# Altium PCB PCB_split_action_2_into_1_1.PcbDoc
Units mm, origin at the board's own origin, x right, y up, seen from the top; angles counter-clockwise.
Board outline 26 x 25 mm, 2 copper layers (Top Layer, Bottom Layer); 6 components, 4 nets, 12 pads, 0 vias.
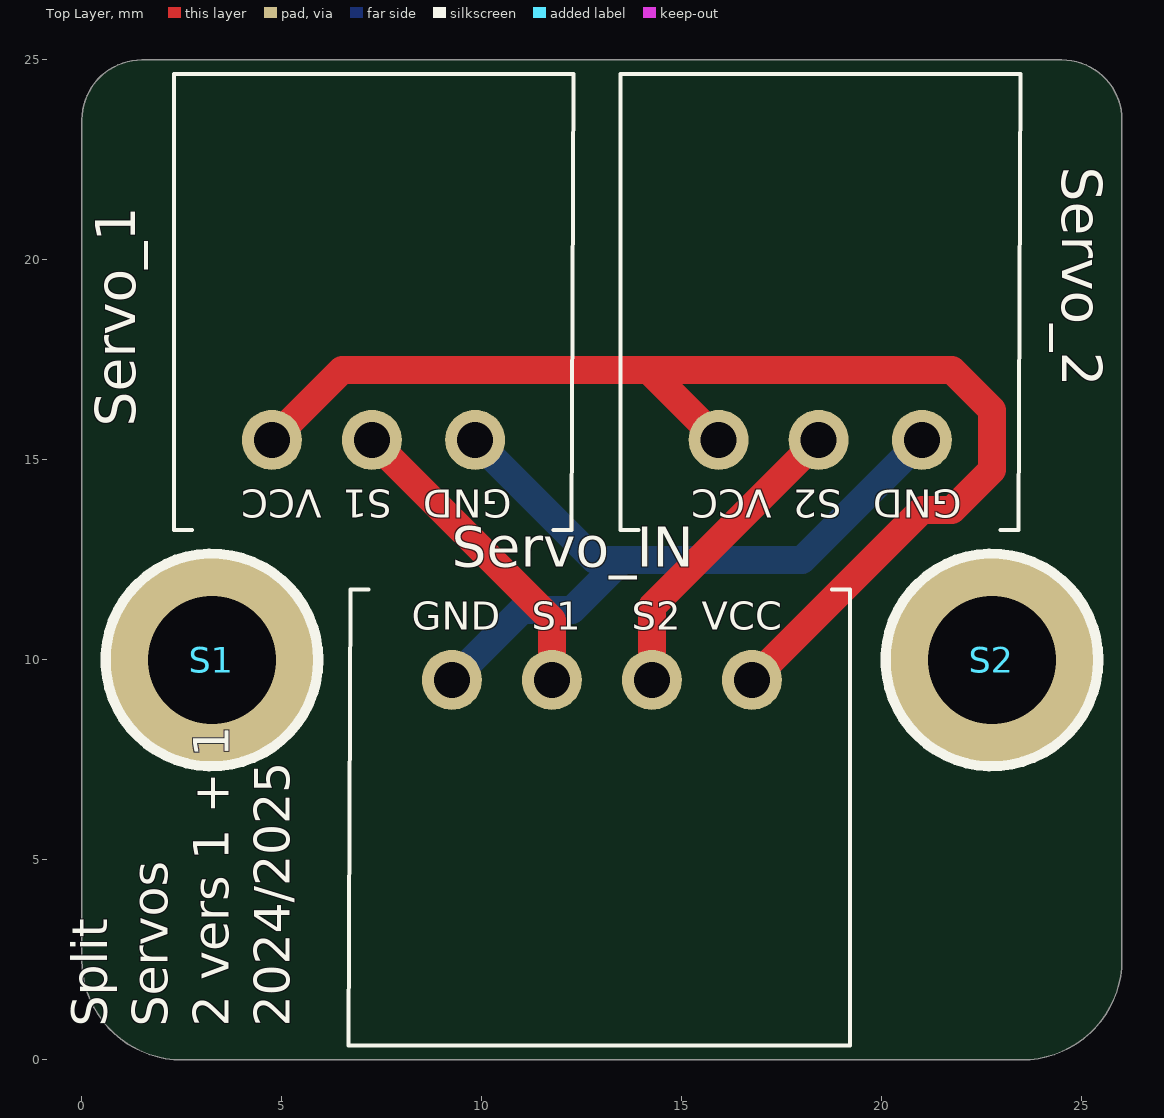
[diagram p0: Top Layer view]
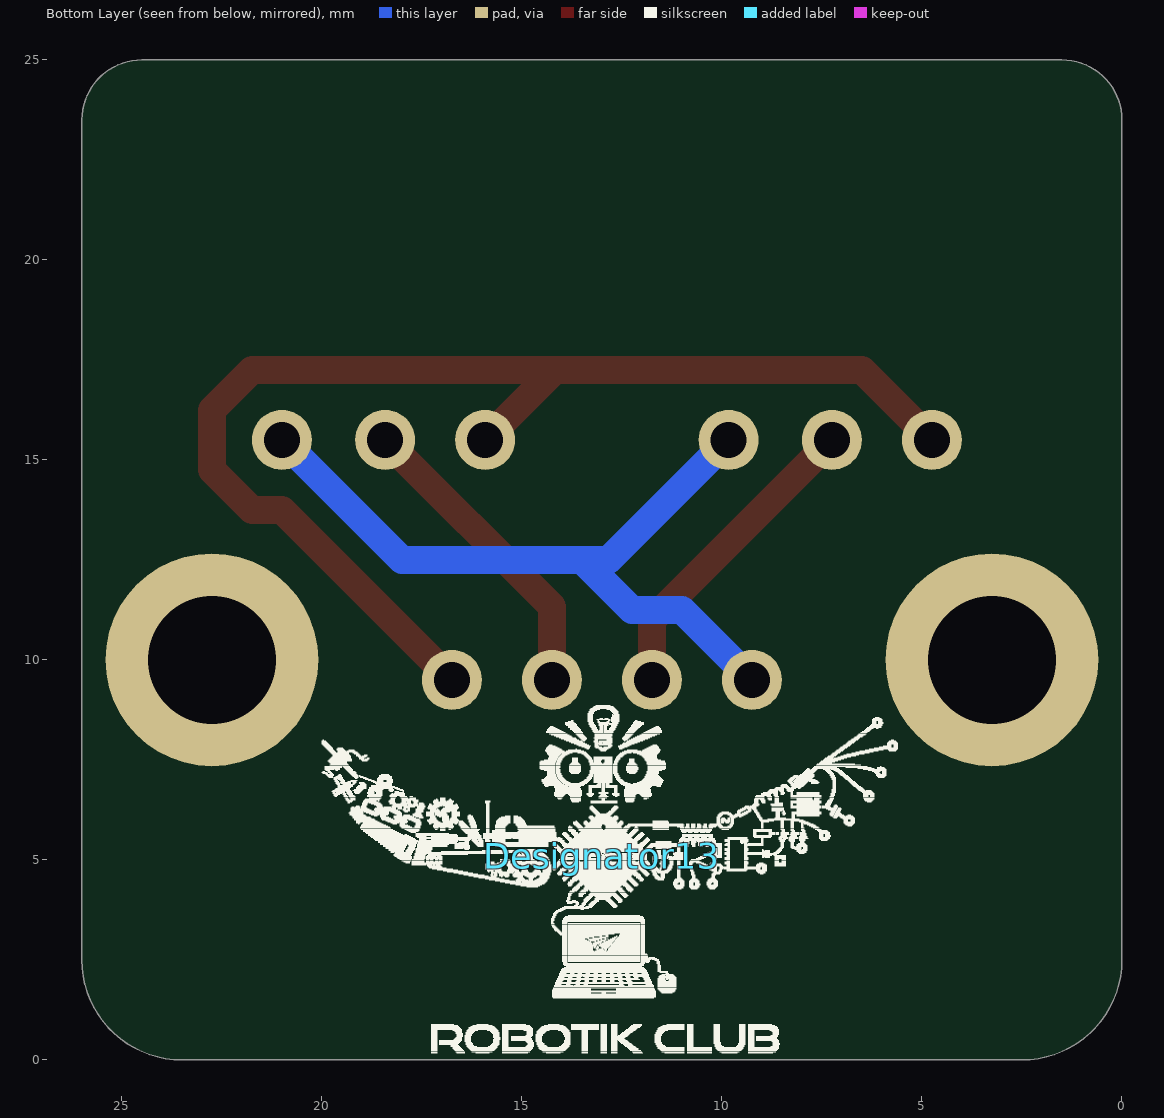
[diagram p1: Bottom Layer view, seen from below]
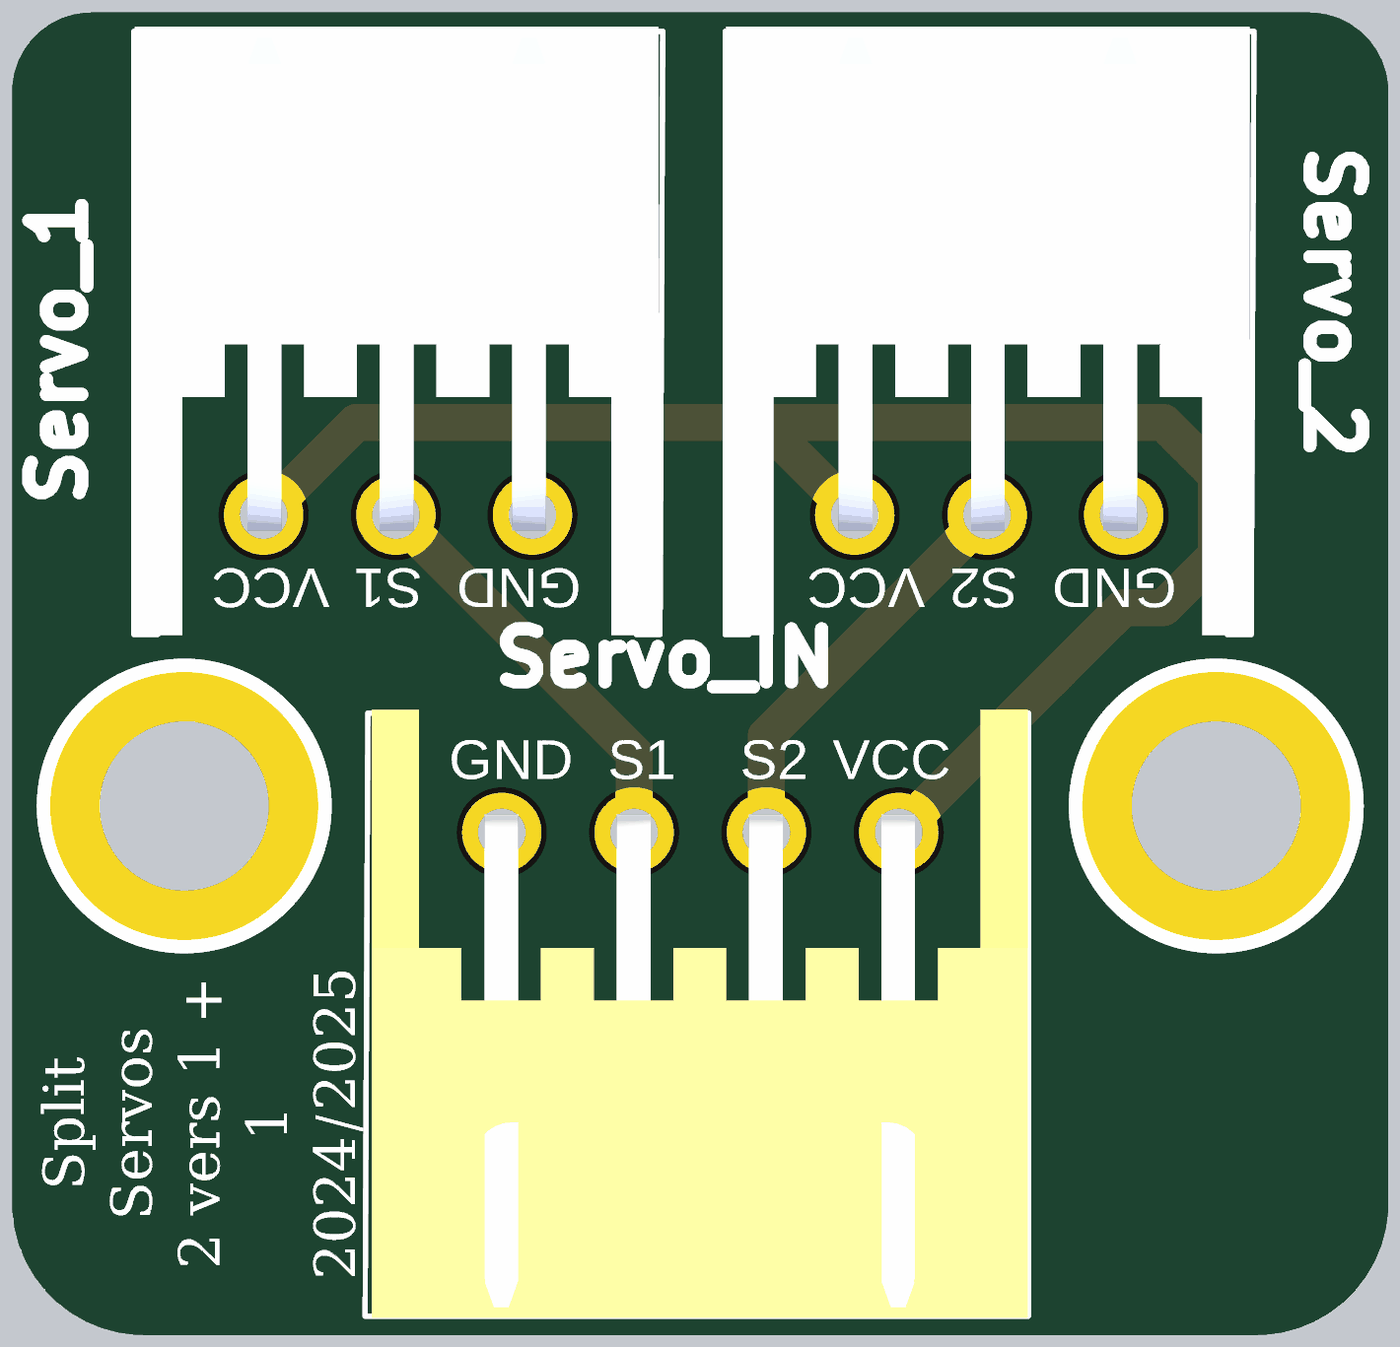
[diagram p2: 3D render of the assembled board from above, using the file's embedded part models]

## Layer stack, top to bottom
Top Solder: solder mask 0.0102, Solder Resist, Dk 3.5
Top Layer: signal copper 0.0356
Dielectric 1: dielectric 0.32, FR-4, Dk 4.8
Bottom Layer: signal copper 0.0356
Bottom Solder: solder mask 0.0102, Solder Resist, Dk 3.5

## Board outline
2.5,0 23.5,0 ccw(c23.5,2.5) 26,2.5 26,23.5 ccw(c24.5,23.5) 24.5,25 1.5,25 ccw(c1.5,23.5) 0,23.5 0,2.5 ccw(c2.5,2.5)

## Design rules (kind name [scope] priority, off if disabled: settings)
Clearance [All] p1: gap=0.254 ignorepadtopadclearanceinfootprint=FALSE
PolygonConnect [All] p1: connectstyle=Relief reliefconductorwidth=0.254 reliefentries=4 polygonreliefangle="90 Angle" airgapwidth=0.254
RoutingVias [All] p1: holewidth=0.711 width=1.27 viastyle="Through Hole" minholewidth=0.711 minwidth=1.27 maxholewidth=0.711 maxwidth=1.27
SolderMaskExpansion [All] p1: expansion=0.102 istentingtop=FALSE
SupplyNets "Schematic Supply Nets_1" [InNet('VCC')] p1: voltage=0.000
SupplyNets "Schematic Supply Nets" [InNet('GND')] p2: voltage=0.000
Width [All] p1: maxlimit=0.7 minlimit=0.254 preferedwidth=0.7
30 further rules are at their usual default settings.

## Classes and differential pairs
component class SchemaSplit_2_into_1_1: S1 S2 Servo_1 Servo_2 Servo_IN

## Components (designator, comment, footprint, x,y, rotation, side; value= is the part's Value field where it differs from the comment)
Designator13 "Comment" Logo_lowres 13,5.1 r180 bottom
S1 "Screw M3" "Screw M3" 3.25,10 r0 top
S2 "Screw M3" "Screw M3" 22.75,10 r0 top
Servo_1 "S3B-XH-A" S3B-XH-A 4.75,15.5 r0 top
Servo_2 "S3B-XH-A" S3B-XH-A 15.92,15.5 r0 top
Servo_IN "Header 4H" S4B-XH-A 16.75,9.5 r180 top

## Footprints (in the part's own frame and the unit in brackets; to place one, negate y for a bottom-side part, rotate by r counter-clockwise, add the part's x,y. Pads: shape width x height; smd on the part's side, far side on the other; paste and mask are expansions set on the pad)
Logo_lowres [mm]
  silkscreen extent -7.01,-4.93 7.39,3.76
S3B-XH-A [mm]
  round 1.5 hole 0.9: 1(0,0) 2(2.5,0) 3(5.08,0)
  silkscreen extent -2.45,-2.26 7.54,9.14, body extent -2.44,-2.27 7.46,9.23, height 6.15
S4B-XH-A [mm]
  round 1.5 hole 0.9: 1(0,0) 2(2.5,0) 3(5,0) 4(7.5,0)
  silkscreen extent -2.45,-2.26 10.08,9.14, body extent -2.44,-2.32 9.96,9.18, height 6.15
"Screw M3" [mm] "M3 iso Screw"
  round 5.32 hole 3.2 unplated: 0(0,0)
  silkscreen extent -2.66,-2.66 2.66,2.66

## Part data
Servo_1 Servo_2: library part "Header 3H", "Header, 3-Pin, Right Angle", LatestRevisionDate=17-Jul-2002, LatestRevisionNote="Re-released for DXP Platform.", Publisher="Altium Limited"
Servo_IN: "Header, 4-Pin, Right Angle", LatestRevisionDate=17-Jul-2002, LatestRevisionNote="Re-released for DXP Platform.", Publisher="Altium Limited"

## Nets (pads, with @x,y where several pads share a name; then routed paths per layer and width w, separated by ;. In a path a pad name is that pad's centre, name@x,y a point inside that pad or via, vN(x,y) a via of type N, cw(c..) or ccw(c..) an arc to the next point about the centre after c; other vN are vias at no path point)
GND: Servo_1.3 Servo_2.3 Servo_IN.4 | length 19.1
  Bottom Layer w0.7: Servo_IN.4 11,11.25 12.25,11.25 13.5,12.5 ; Servo_1.3 12.83,12.5 13.5,12.5 ; Servo_2.3 18,12.5 13.5,12.5
S_IN_1: Servo_1.2 Servo_IN.3 | length 8.1
  Top Layer w0.7: Servo_1.2 11.75,11 Servo_IN.3 Servo_IN.3@11.597,9.653
S_IN_2: Servo_2.2 Servo_IN.2 | length 7.7
  Top Layer w0.7: Servo_IN.2 14.25,11.33 Servo_2.2
VCC: Servo_1.1 Servo_2.1 Servo_IN.1 | length 31.3
  Top Layer w0.7: Servo_1.1 6.5,17.25 13.75,17.25 14.17,17.25 ; Servo_2.1 14.17,17.25 ; Servo_IN.1 21,13.75 21.75,13.75 22.75,14.75 22.75,16.25 21.75,17.25 14.17,17.25
pads on no net: S1.0 S2.0

## Silkscreen, mask and mechanical layers (free items; w line width, h text height)
Top Overlay:
  text "VCC" at 5.999,14.487 h1.2 r180
  text "S1" at 7.75,14.487 h1.2 r180
  text "GND" at 10.75,14.487 h1.2 r180
  text "VCC" at 17.249,14.487 h1.2 r180
  text "S2" at 19,14.487 h1.2 r180
  text "GND" at 22,14.487 h1.2 r180
  text "GND" at 8.25,10.513 h1.2
  text "S1" at 11.25,10.513 h1.2
  text "S2" at 13.75,10.513 h1.2
  text "VCC" at 15.501,10.513 h1.2
  text "Split / Servos / 2 vers 1 + 1 / 2024/2025" at 5.5,0.823 h1.52 r90
Mechanical 1:
  the board outline again, w0.254